# Altium PCB TRISECT_Main.PcbDoc
Units mil, origin at the board's own origin, x right, y up, seen from the top; angles counter-clockwise.
Board outline 3500 x 3031.1 mil, 2 copper layers (Top Layer, Bottom Layer); 9 components, 19 nets, 90 pads, 0 vias.
Unrouted connection lines stored in the file: 3.
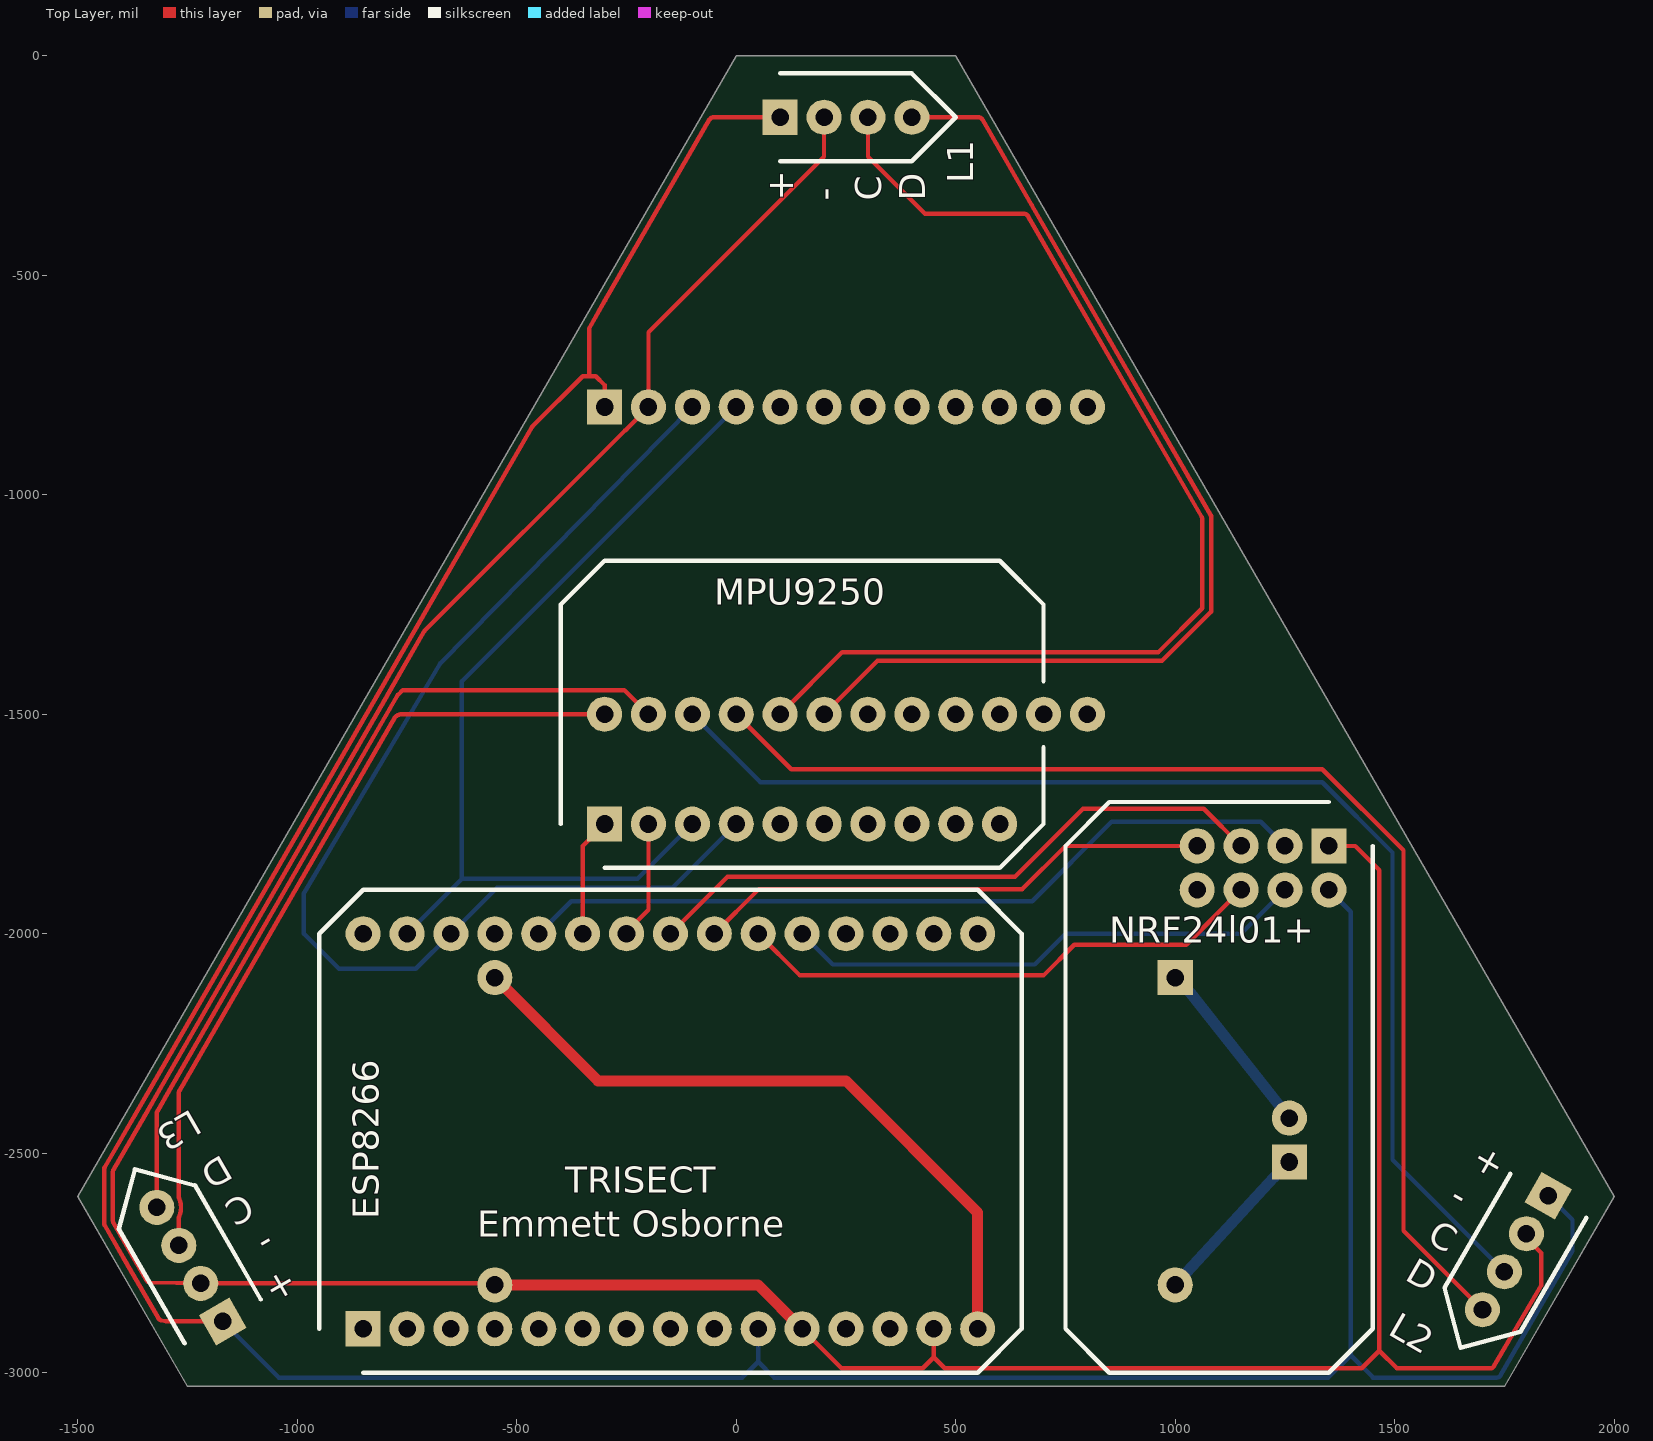
[diagram p0: Top Layer view]
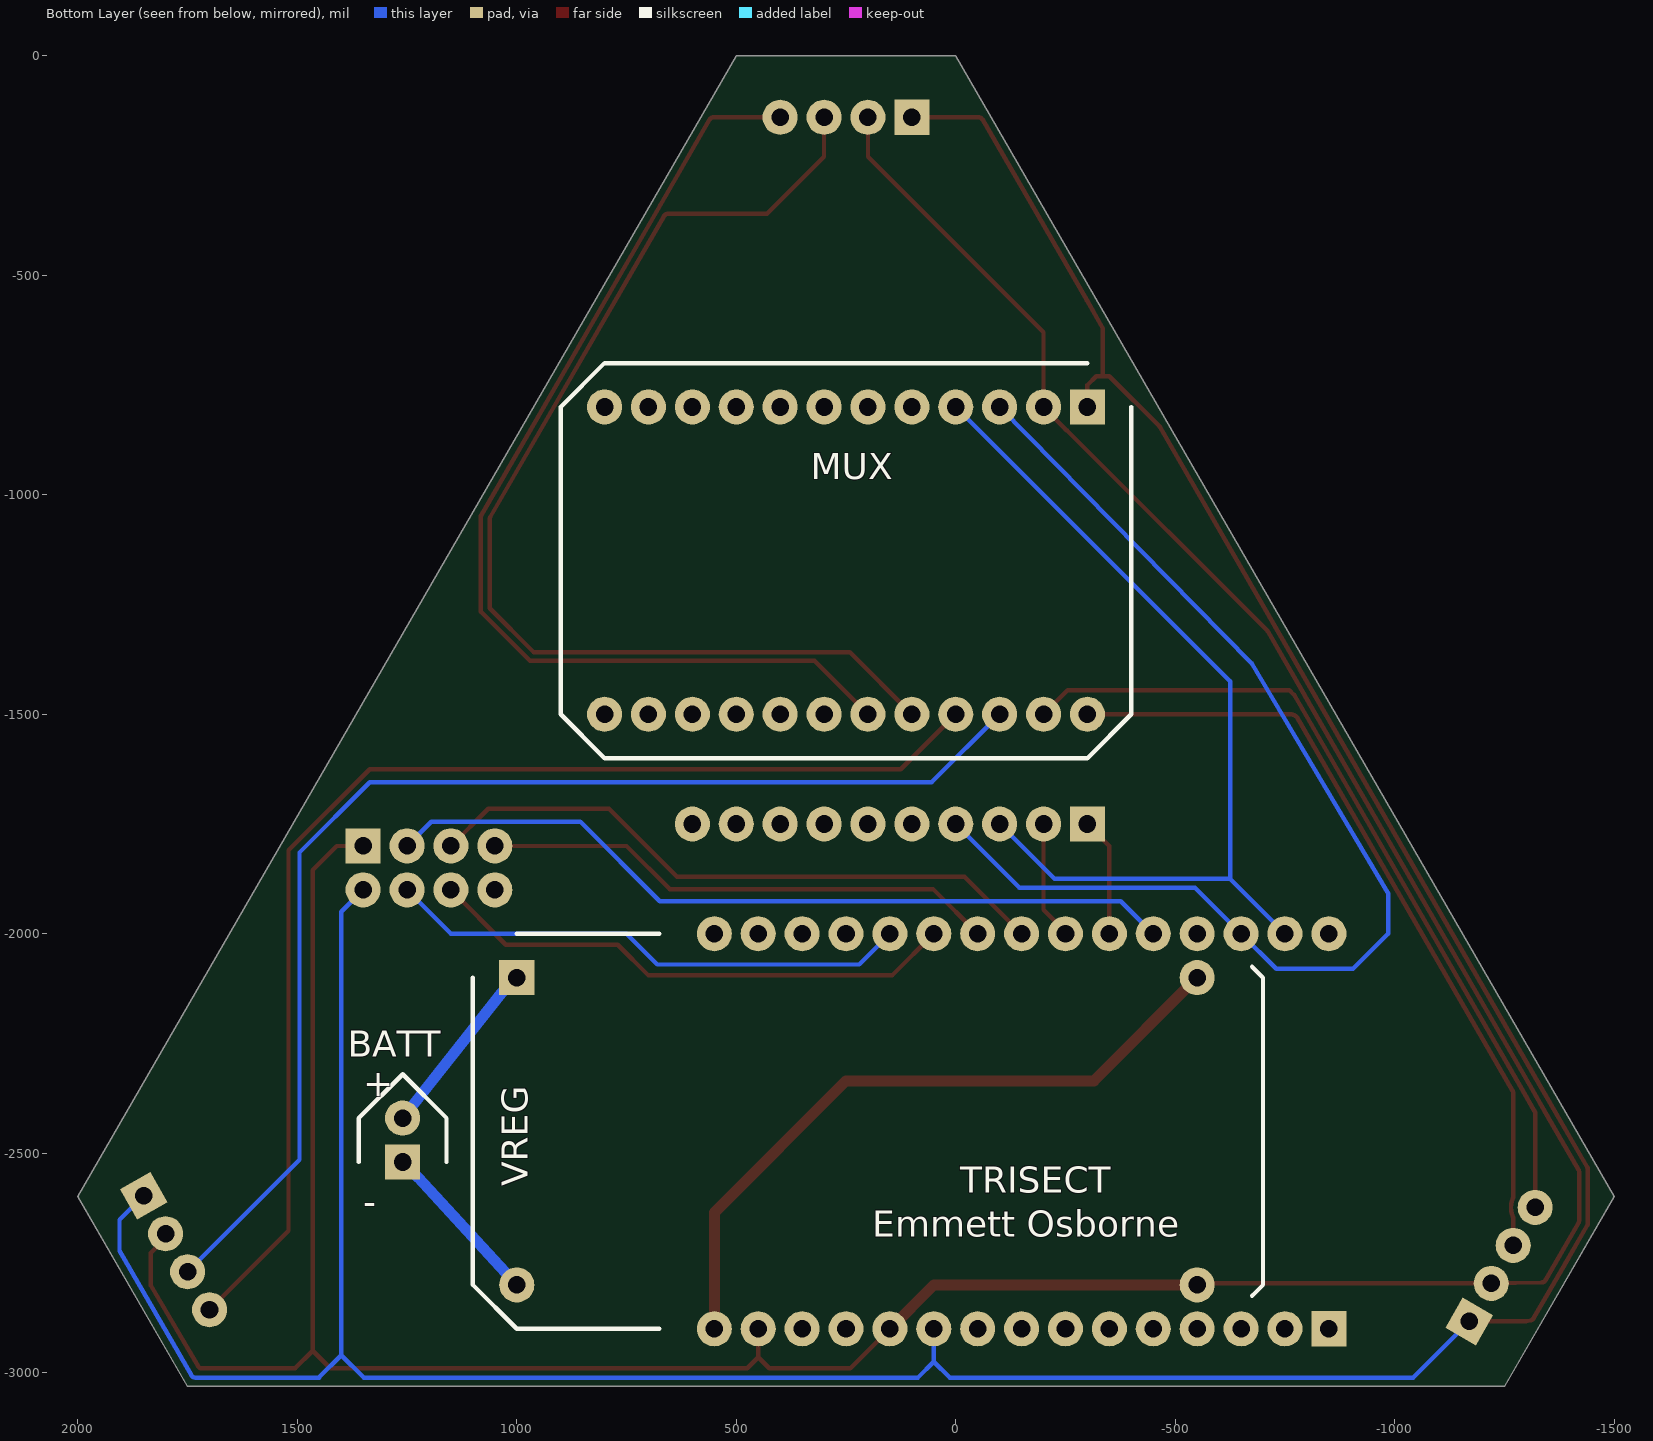
[diagram p1: Bottom Layer view, seen from below]

## Layer stack, top to bottom
Top Solder: solder mask 0.4, Solder Resist, Dk 3.5
Top Layer: signal copper 1.4
Dielectric 1: dielectric 12.6, FR-4, Dk 4.8
Bottom Layer: signal copper 1.4
Bottom Solder: solder mask 0.4, Solder Resist, Dk 3.5

## Board outline
-1250,-3031.1 -1500,-2598.1 0,0 500,0 2000,-2598.1 1750,-3031.1

## Design rules (kind name [scope] priority, off if disabled: settings)
Clearance [All] p1: gap=10 ignorepadtopadclearanceinfootprint=FALSE
PolygonConnect [All] p1: connectstyle=Relief reliefconductorwidth=10 reliefentries=4 polygonreliefangle="90 Angle" airgapwidth=10
RoutingVias [All] p1: holewidth=28 width=50 viastyle="Through Hole" minholewidth=28 minwidth=50 maxholewidth=28 maxwidth=50
SolderMaskExpansion [All] p1: expansion=4 istentingtop=FALSE
SupplyNets "Schematic Supply Nets" [InNet('GND')] p1: voltage=0.000
Width [All] p1: maxlimit=25 minlimit=10 preferedwidth=10 minimp=50.000000 maximp=50.000000 favimp=50.000000
30 further rules are at their usual default settings.

## Components (designator, comment, footprint, x,y, rotation, side; value= is the part's Value field where it differs from the comment)
BATT "2PCON" 2PCON 1260,-2420 r180 bottom (schematic designator 2P_1)
ESP8266 "ESP8266" ESP8266 -850,-2900 r90 top (schematic designator ESP8266_1)
L1 "4PCON" 4PCON 100,-140 r90 top (schematic designator 4P_1)
L2 "4PCON" 4PCON 1850,-2596.79 r330 top (schematic designator 4P_2)
L3 "4PCON" 4PCON -1170,-2883.21 r210 top (schematic designator 4P_3)
MPU9250 "MPU9250" MPU9250 -300,-1750 r90 top (schematic designator MPU9250_1)
MUX "TCA9548A" TCA9548A -300,-800 r270 bottom (schematic designator MUX_1)
NRF24l01+ "NRF24l01+" NRF24l01+ 1350,-1800 r270 top (schematic designator NRF24l01+_1)
VREG "VREG" VREG 1000,-2100 r180 bottom (schematic designator VREG_1)

## Footprints (in the part's own frame and the unit in brackets; to place one, negate y for a bottom-side part, rotate by r counter-clockwise, add the part's x,y. Pads: shape width x height; smd on the part's side, far side on the other; paste and mask are expansions set on the pad)
2PCON [mil] "2 pin connector"
  rect 80x80 hole 40: 1(0,-100)
  round 80 hole 40: 2(0,0)
  silkscreen extent -100,-100 100,100
4PCON [mil] "4 pin connector"
  rect 80x80 hole 40: 1(0,0)
  round 80 hole 40: 2(0,-100) 3(0,-200) 4(0,-300)
  silkscreen extent -100,-400 100,0
ESP8266 [mil] "ESP8266 Basic Pinned Through Hole (NodeMCU)"
  rect 80x80 hole 40: 1(0,0)
  round 80 hole 40: 2(0,-100) 3(0,-200) 4(0,-300) 5(0,-400) 6(0,-500) 7(0,-600) 8(0,-700) 9(0,-800) 10(0,-900) 11(0,-1000) 12(0,-1100) 13(0,-1200) 14(0,-1300) 15(0,-1400) 16(900,0) 17(900,-100) 18(900,-200) 19(900,-300) 20(900,-400) 21(900,-500) 22(900,-600) 23(900,-700) 24(900,-800) 25(900,-900) 26(900,-1000) 27(900,-1100) 28(900,-1200) 29(900,-1300) 30(900,-1400)
  silkscreen extent -100,-1500 1000,100
MPU9250 [mil] "Basic pinout for MPU9250"
  rect 80x80 hole 40: 1(0,0)
  round 80 hole 40: 2(0,-100) 3(0,-200) 4(0,-300) 5(0,-400) 6(0,-500) 7(0,-600) 8(0,-700) 9(0,-800) 10(0,-900)
  silkscreen extent -100,-1000 600,100
NRF24l01+ [mil] "NRF24l01+ footprint"
  rect 80x80 hole 40: 1(0,0)
  round 80 hole 40: 2(0,-100) 3(0,-200) 4(0,-300) 5(100,0) 6(100,-100) 7(100,-200) 8(100,-300)
  silkscreen extent -100,-600 1200,100
TCA9548A [mil] "TCA9548A basic pinout"
  rect 80x80 hole 40: 1(0,0)
  round 80 hole 40: 2(0,-100) 3(0,-200) 4(0,-300) 5(0,-400) 6(0,-500) 7(0,-600) 8(0,-700) 9(0,-800) 10(0,-900) 11(0,-1000) 12(0,-1100) 13(700,0) 14(700,-100) 15(700,-200) 16(700,-300) 17(700,-400) 18(700,-500) 19(700,-600) 20(700,-700) 21(700,-800) 22(700,-900) 23(700,-1000) 24(700,-1100)
  silkscreen extent -100,-1200 800,100
VREG [mil] "Voltage regulator"
  rect 80x80 hole 40: 1(0,0)
  round 80 hole 40: 2(0,-700) 3(1550,0) 4(1550,-700)
  silkscreen extent -100,-800 1700,100

## Part data
BATT: "2 pin connector"
ESP8266: "Basic pinout for ESP8266 (NodeMCU)"
L1 L2 L3: "4 pin connector"
MPU9250: "MPU9250 basic pinout"
MUX: "TCA9548A multiplexer 1:8 basic pinout"
NRF24l01+: "NRF24l01+ basic pinout"
VREG: "Voltage Regulator - basic pinout"

## Nets (pads, with @x,y where several pads share a name; then routed paths per layer and width w, separated by ;. In a path a pad name is that pad's centre, name@x,y a point inside that pad or via, vN(x,y) a via of type N, cw(c..) or ccw(c..) an arc to the next point about the centre after c; other vN are vias at no path point)
3V3: ESP8266.10 ESP8266.21 ESP8266.30 L1.1 L2.1 L3.1 MPU9250.1 MUX.1 NRF24l01+.5 | length 8506.8
  Top Layer w10: L3.1 -1288.91,-2883.21 cw(c-1288.91,-2783.21) -1309.81,-2881 cw(c-1307.66,-2871.23) -1316.29,-2876.28 -1388.91,-2750.5 -1438.67,-2664.32 cw(c-1430,-2659.34) -1440,-2659.34 -1440,-2536.86 cw(c-1430,-2536.86) -1438.66,-2531.86 -1330,-2343.65 -819.96,-1460.22 -728.25,-1301.38 -465.08,-845.56 cw(c-456.42,-850.56) -463.51,-843.51 -350,-730 -335,-730 ; ESP8266.21 -350,-1800 MPU9250.1 ; MUX.1 -300,-750 -320,-730 -335,-730 ; L1.1 -51.96,-140 ccw(c-51.96,-150) -60.61,-144.98 -298.66,-557.3 -335,-620.24 -335,-730
  Bottom Layer w10: L3.1 -1042.1,-3011.1 13.9,-3011.1 50,-2975 ; ESP8266.10 50,-2975 ; NRF24l01+.5 1400,-1950 1400,-2960 ; L2.1 1905,-2651.79 1905,-2722.64 1741.34,-3006.1 cw(c1732.68,-3001.1) 1732.68,-3011.1 1450,-3011.1 1450,-3010 1400,-2960 ; 50,-2975 86.1,-3011.1 1348.9,-3011.1 1400,-2960
CE: ESP8266.20 NRF24l01+.2 | length 1828.4
  Bottom Layer w10: ESP8266.20 -375.8,-1925.8 674.2,-1925.8 855,-1745 1195,-1745 NRF24l01+.2
CSN: ESP8266.26 NRF24l01+.6 | length 1199.4
  Bottom Layer w10: ESP8266.26 220,-2070 680,-2070 750,-2000 1150,-2000 NRF24l01+.6
GND: ESP8266.11 ESP8266.14 ESP8266.22 L1.2 L2.2 L3.2 MPU9250.2 MUX.2 NRF24l01+.1 VREG.4 | length 8357.5
  Top Layer w10: -1334.78,-2794.58 L3.2 -558.2,-2796.6 cw(c-558.2,-2808.2) VREG.4 ; -1334.8,-2794.57 cw(c-1334.6,-2784.58) -1343.28,-2789.54 -1418.68,-2658.96 cw(c-1410,-2653.98) -1420,-2653.98 -1420,-2542.21 cw(c-1410,-2542.21) -1418.66,-2537.22 -1348.46,-2415.63 -1312.7,-2353.68 -802.66,-1470.26 -787.79,-1444.51 -710.97,-1311.44 cw(c-702.32,-1316.46) -709.4,-1309.4 -254.56,-854.56 cw(c-247.52,-861.66) -252.54,-853.01 ccw(c-260,-840) -249.23,-850.44 MUX.2 -200,-630 200,-230 L1.2 ; ESP8266.22 -250,-1995.43 -200,-1945.43 MPU9250.2 ; ESP8266.11 240,-2990 425,-2990 450,-2965 ; ESP8266.14 450,-2965 ; NRF24l01+.1 1410,-1800 1465,-1855 1465,-2950 ; L2.2 1800,-2693.23 1833.97,-2727.2 1833.97,-2801.32 1725.16,-2986.17 1721.33,-2990 1505,-2990 1465,-2950 ; 450,-2965 475,-2990 1425,-2990 1465,-2950
  Top Layer w25: VREG.4 50,-2800 ESP8266.11
GND_IN: BATT.1 VREG.2 | length 382.1
  Bottom Layer w25: VREG.2 1225,-2555 BATT.1
L1C: L1.3 MUX.17 | length 2571.6
  Top Layer w10: MUX.17 241.7,-1358.3 961.7,-1358.3 1061.7,-1258.3 1061.7,-1055.58 ccw(c1051.7,-1055.58) 1060.36,-1050.58 664.54,-365 ccw(c655.88,-370) 655.88,-360 430,-360 300,-230 L1.3
L1D: L1.4 MUX.18 | length 2402
  Top Layer w10: MUX.18 321.7,-1378.3 970,-1378.3 1081.72,-1266.58 1081.72,-1047.58 673.17,-339.95 560.62,-145 ccw(c551.96,-150) 551.96,-140 L1.4
L2C: L2.3 MUX.15 | length 2786.1
  Bottom Layer w10: MUX.15 55,-1655 1335,-1655 1495,-1815 1495,-2515 L2.3
L2D: L2.4 MUX.16 | length 2769.6
  Top Layer w10: MUX.16 125,-1625 1335,-1625 1520,-1810 1520,-2676.6 L2.4
L3C: L3.3 MUX.13 | length 1815.8
  Top Layer w10: L3.3 -1270,-2648.4 cw(c-1260,-2648.4) -1269.23,-2644.55 ccw(c-1320,-2623.4) -1269.23,-2602.24 cw(c-1260,-2598.4) -1270,-2598.4 -1270,-2362.41 cw(c-1260,-2362.41) -1268.66,-2357.41 -777.4,-1506.5 cw(c-761.7,-1522.2) -761.7,-1500 MUX.13
L3D: L3.4 MUX.14 | length 1912.8
  Top Layer w10: L3.4 -1320,-2409.01 cw(c-1310,-2409.01) -1318.66,-2404.01 -1290,-2354.37 -789.44,-1487.37 -772.43,-1457.91 cw(c-763.78,-1462.93) -770.87,-1455.87 -760,-1445 -255,-1445 MUX.14
MISO: ESP8266.24 NRF24l01+.4 | length 1182.8
  Top Layer w10: ESP8266.24 51.7,-1898.3 651.7,-1898.3 750,-1800 NRF24l01+.4
MOSI: ESP8266.25 NRF24l01+.7 | length 1220.1
  Top Layer w10: ESP8266.25 145,-2095 700,-2095 770,-2025 1025,-2025 NRF24l01+.7
SCK: ESP8266.23 NRF24l01+.3 | length 1453.3
  Top Layer w10: ESP8266.23 -20,-1870 635,-1870 790,-1715 1065,-1715 NRF24l01+.3
SCL: ESP8266.17 MPU9250.3 MUX.4 | length 2087.4
  Bottom Layer w10: ESP8266.17 -625,-1875 ; MPU9250.3 -225,-1875 -625,-1875 ; MUX.4 -625,-1425 -625,-1875
SDA: ESP8266.18 MPU9250.4 MUX.3 | length 2675.2
  Bottom Layer w10: MUX.3 -674.15,-1384.14 ccw(c-667.02,-1391.15) -675.62,-1386.04 -983.6,-1904.97 -985,-1907.33 -985,-1910.07 -985,-2000 -905,-2080 -730,-2080 ESP8266.18 -545,-1895 -145,-1895 MPU9250.4
V+: 
VIN: ESP8266.15 VREG.3 | length 1586.6
  Top Layer w25: VREG.3 -315,-2335 250,-2335 550,-2635 ESP8266.15
VIN_IN: BATT.2 VREG.1 | length 412.6
  Bottom Layer w25: VREG.1 1035,-2135 BATT.2
pads on no net: ESP8266.1 ESP8266.2 ESP8266.3 ESP8266.4 ESP8266.5 ESP8266.6 ESP8266.7 ESP8266.8 ESP8266.9 ESP8266.12 ESP8266.13 ESP8266.16 ESP8266.19 ESP8266.27 ESP8266.28 ESP8266.29 MPU9250.5 MPU9250.6 MPU9250.7 MPU9250.8 MPU9250.9 MPU9250.10 MUX.5 MUX.6 MUX.7 MUX.8 MUX.9 MUX.10 MUX.11 MUX.12 MUX.19 MUX.20 MUX.21 MUX.22 MUX.23 MUX.24 NRF24l01+.8

## Silkscreen, mask and mechanical layers (free items; w line width, h text height)
Top Overlay:
  text "TRISECT" at -390,-2590 h60
  text "Emmett Osborne" at -590,-2690 h60
Bottom Overlay:
  text "TRISECT" at -10,-2590 h60
  text "Emmett Osborne" at 190,-2690 h60

## Text inside footprints (layer, text, board x,y; h text height)
BATT: Bottom Overlay "+" at 1350,-2370 h60; Bottom Overlay "-" at 1350,-2639.99 h60
L1: Top Overlay "D" at 430,-330 h60 r90; Top Overlay "+" at 130,-330 h60 r90; Top Overlay "-" at 229.99,-330 h60 r90; Top Overlay "C" at 330,-330 h60 r90
L2: Top Overlay "D" at 1520.46,-2787.58 h60 r330; Top Overlay "+" at 1670.46,-2527.77 h60 r330; Top Overlay "-" at 1620.46,-2614.37 h60 r330; Top Overlay "C" at 1570.46,-2700.98 h60 r330
L3: Top Overlay "D" at -1170.46,-2502.42 h60 r210; Top Overlay "+" at -1020.45,-2762.23 h60 r210; Top Overlay "-" at -1070.45,-2675.63 h60 r210; Top Overlay "C" at -1120.46,-2589.02 h60 r210